# Altium PCB 14.22x14.22.PcbDoc
Units mil, origin at the board's own origin, x right, y up, seen from the top; angles counter-clockwise.
Board outline 14220 x 14220 mil, 4 copper layers (Top Layer, Internal Plane 1, Internal Plane 2, Bottom Layer), stack 18.2 mil thick; 322 components, 110 nets, 810 pads, 0 vias.
Unrouted connection lines stored in the file: 678.
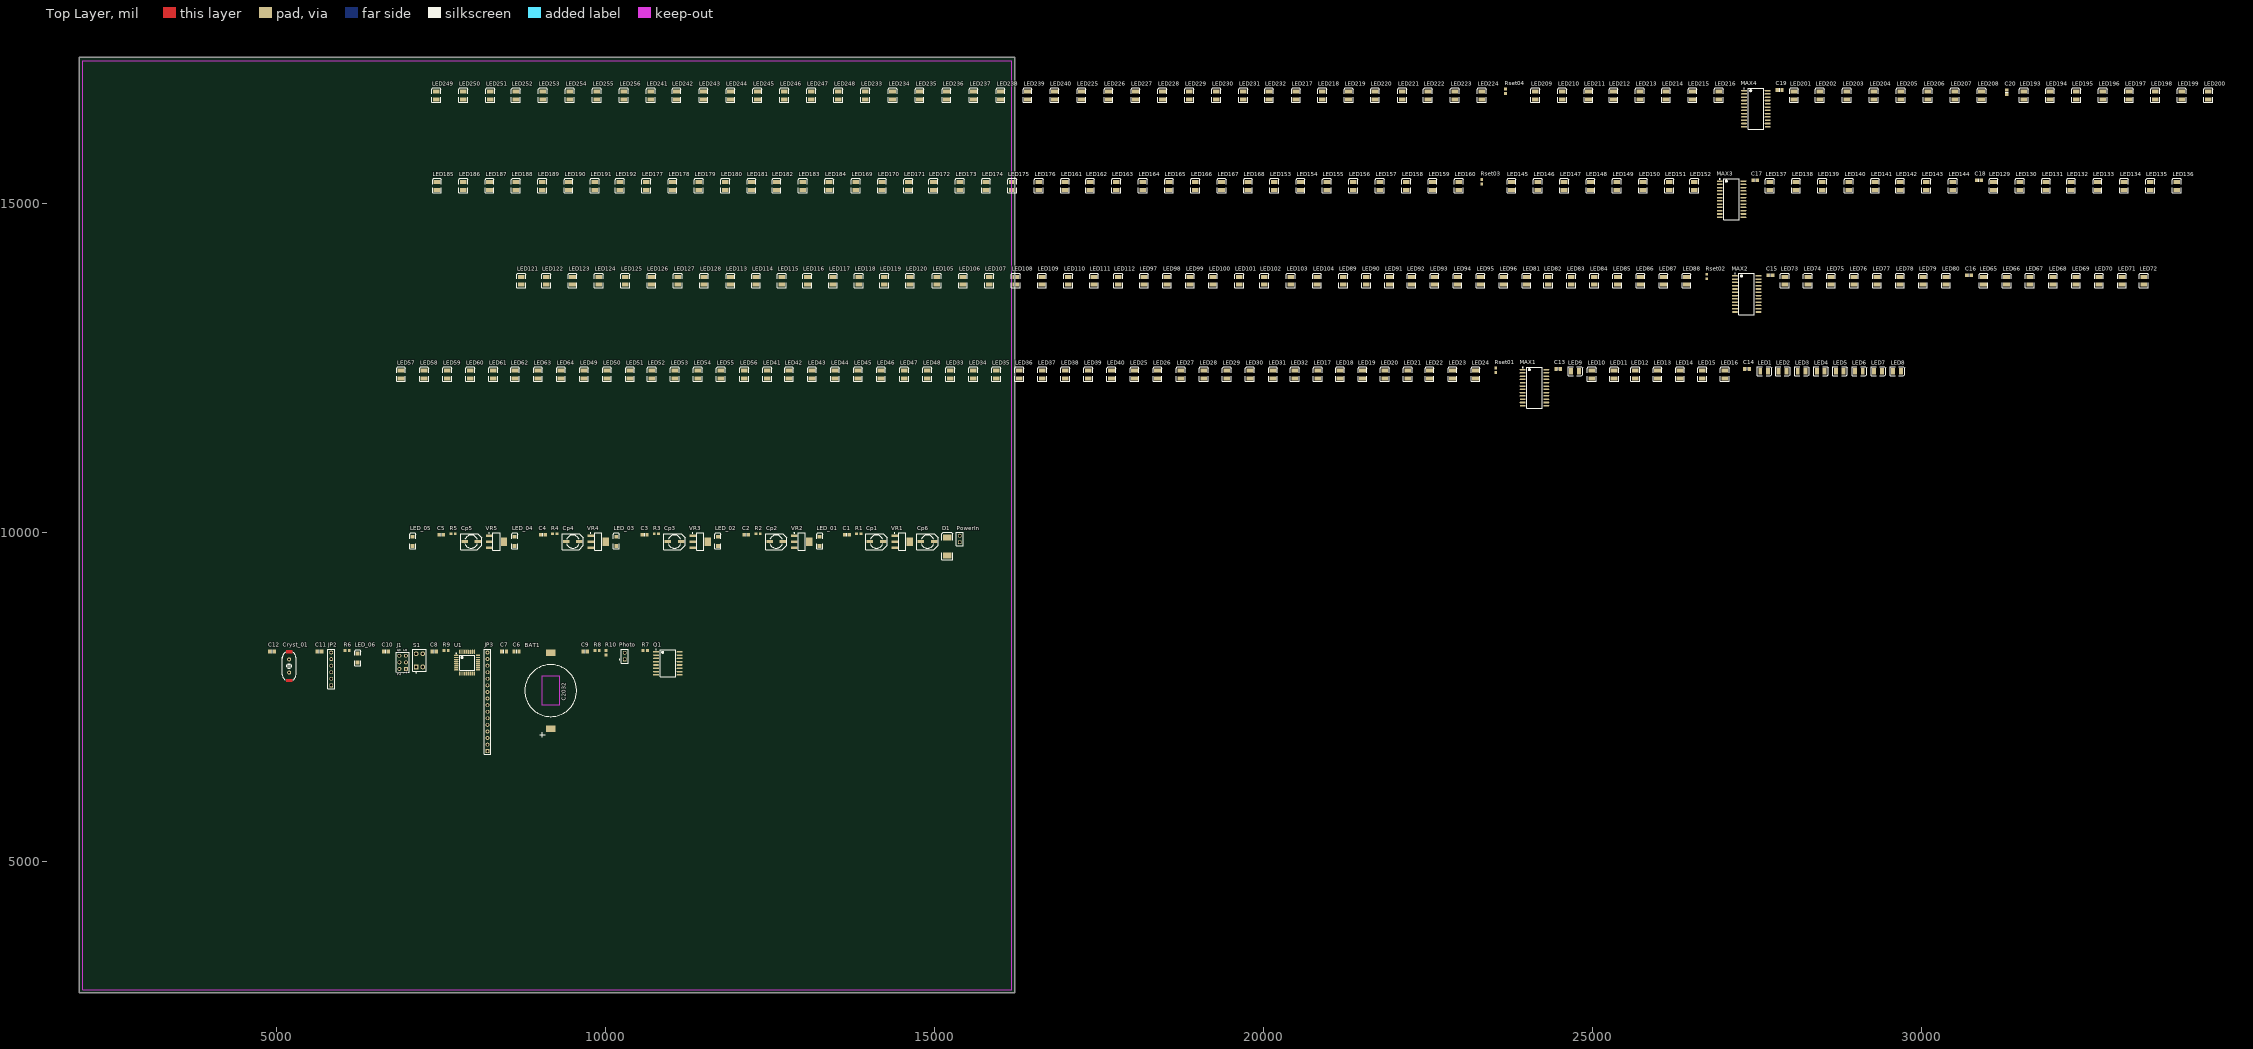
[diagram p0: Top Layer view]
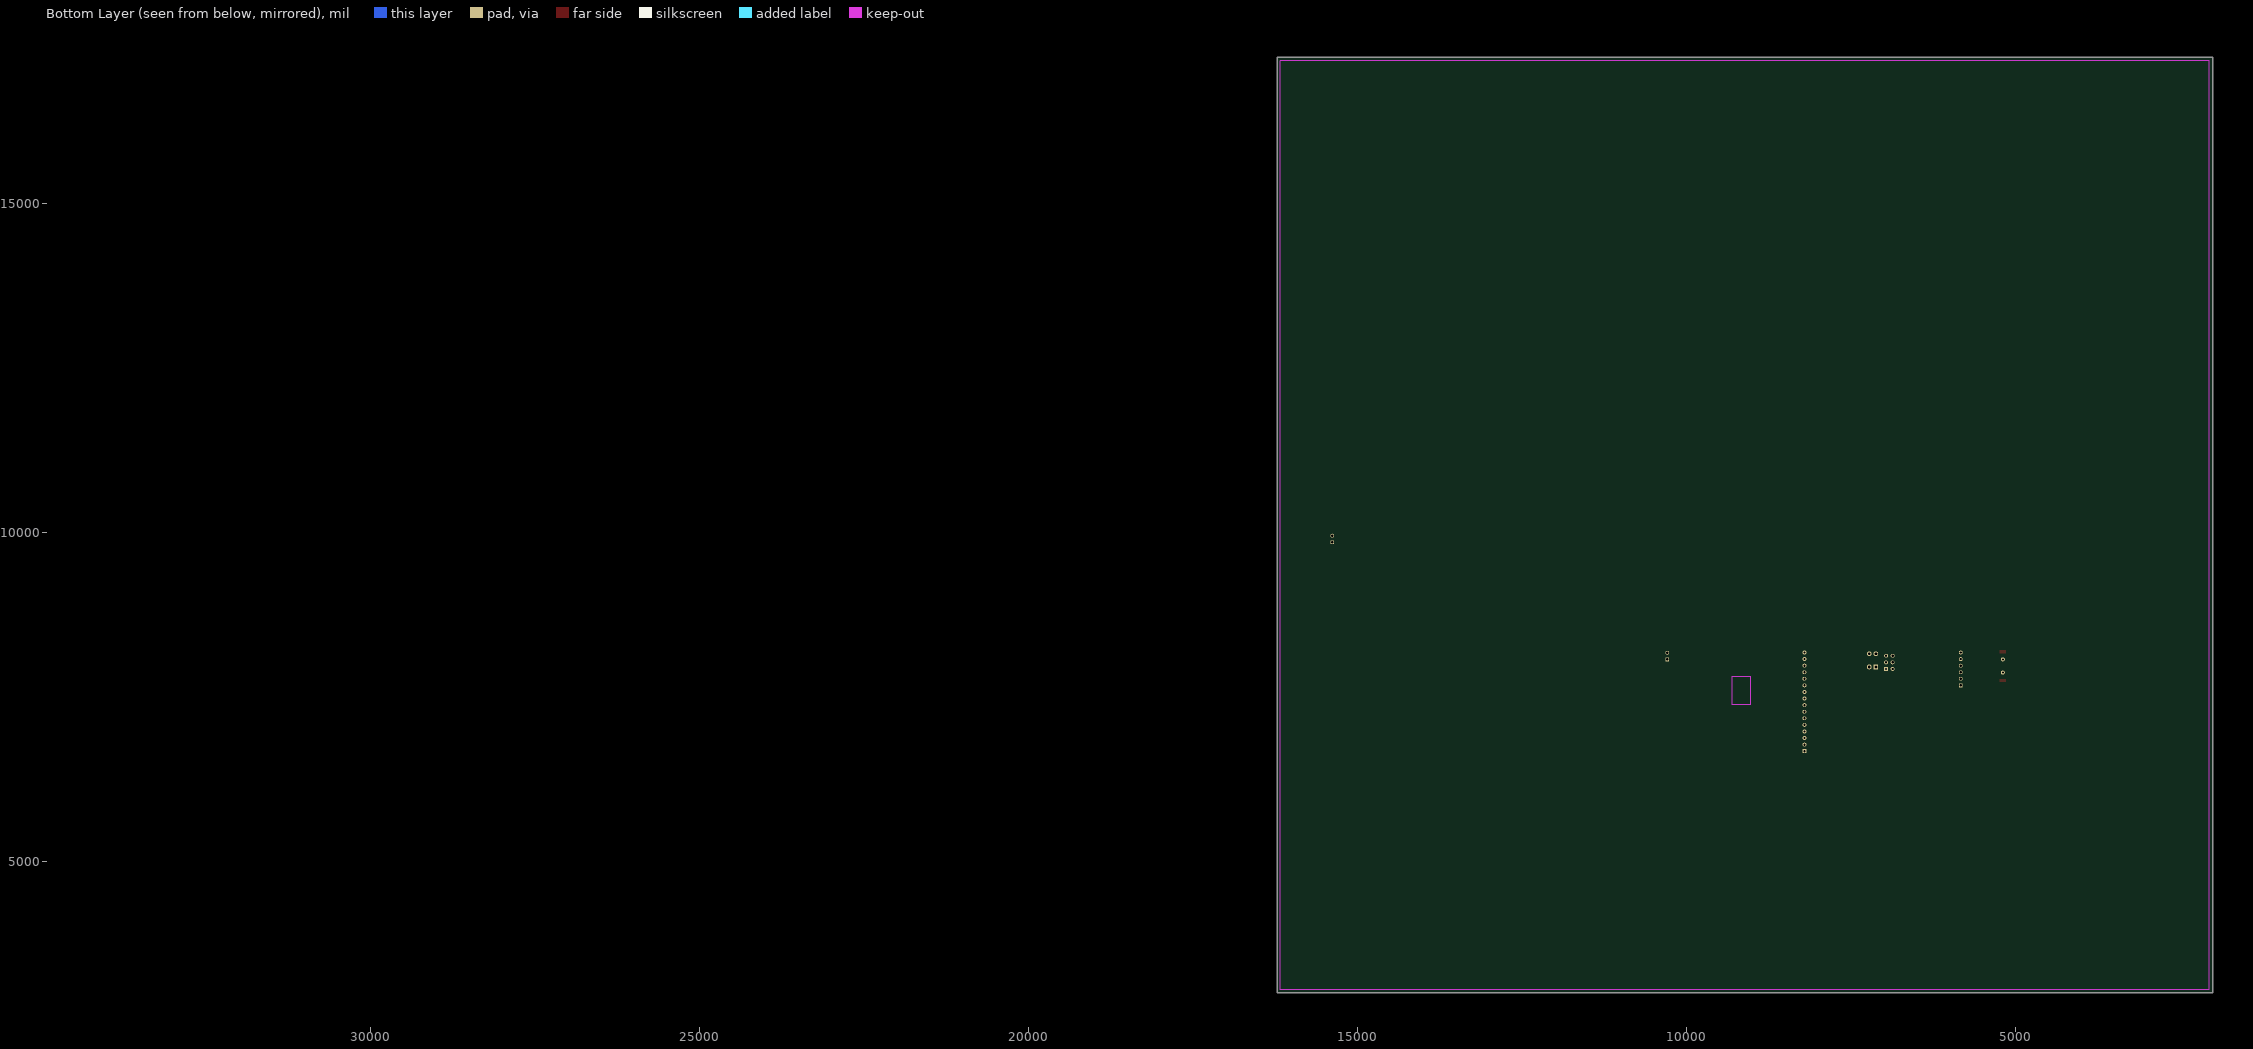
[diagram p1: Bottom Layer view, seen from below]
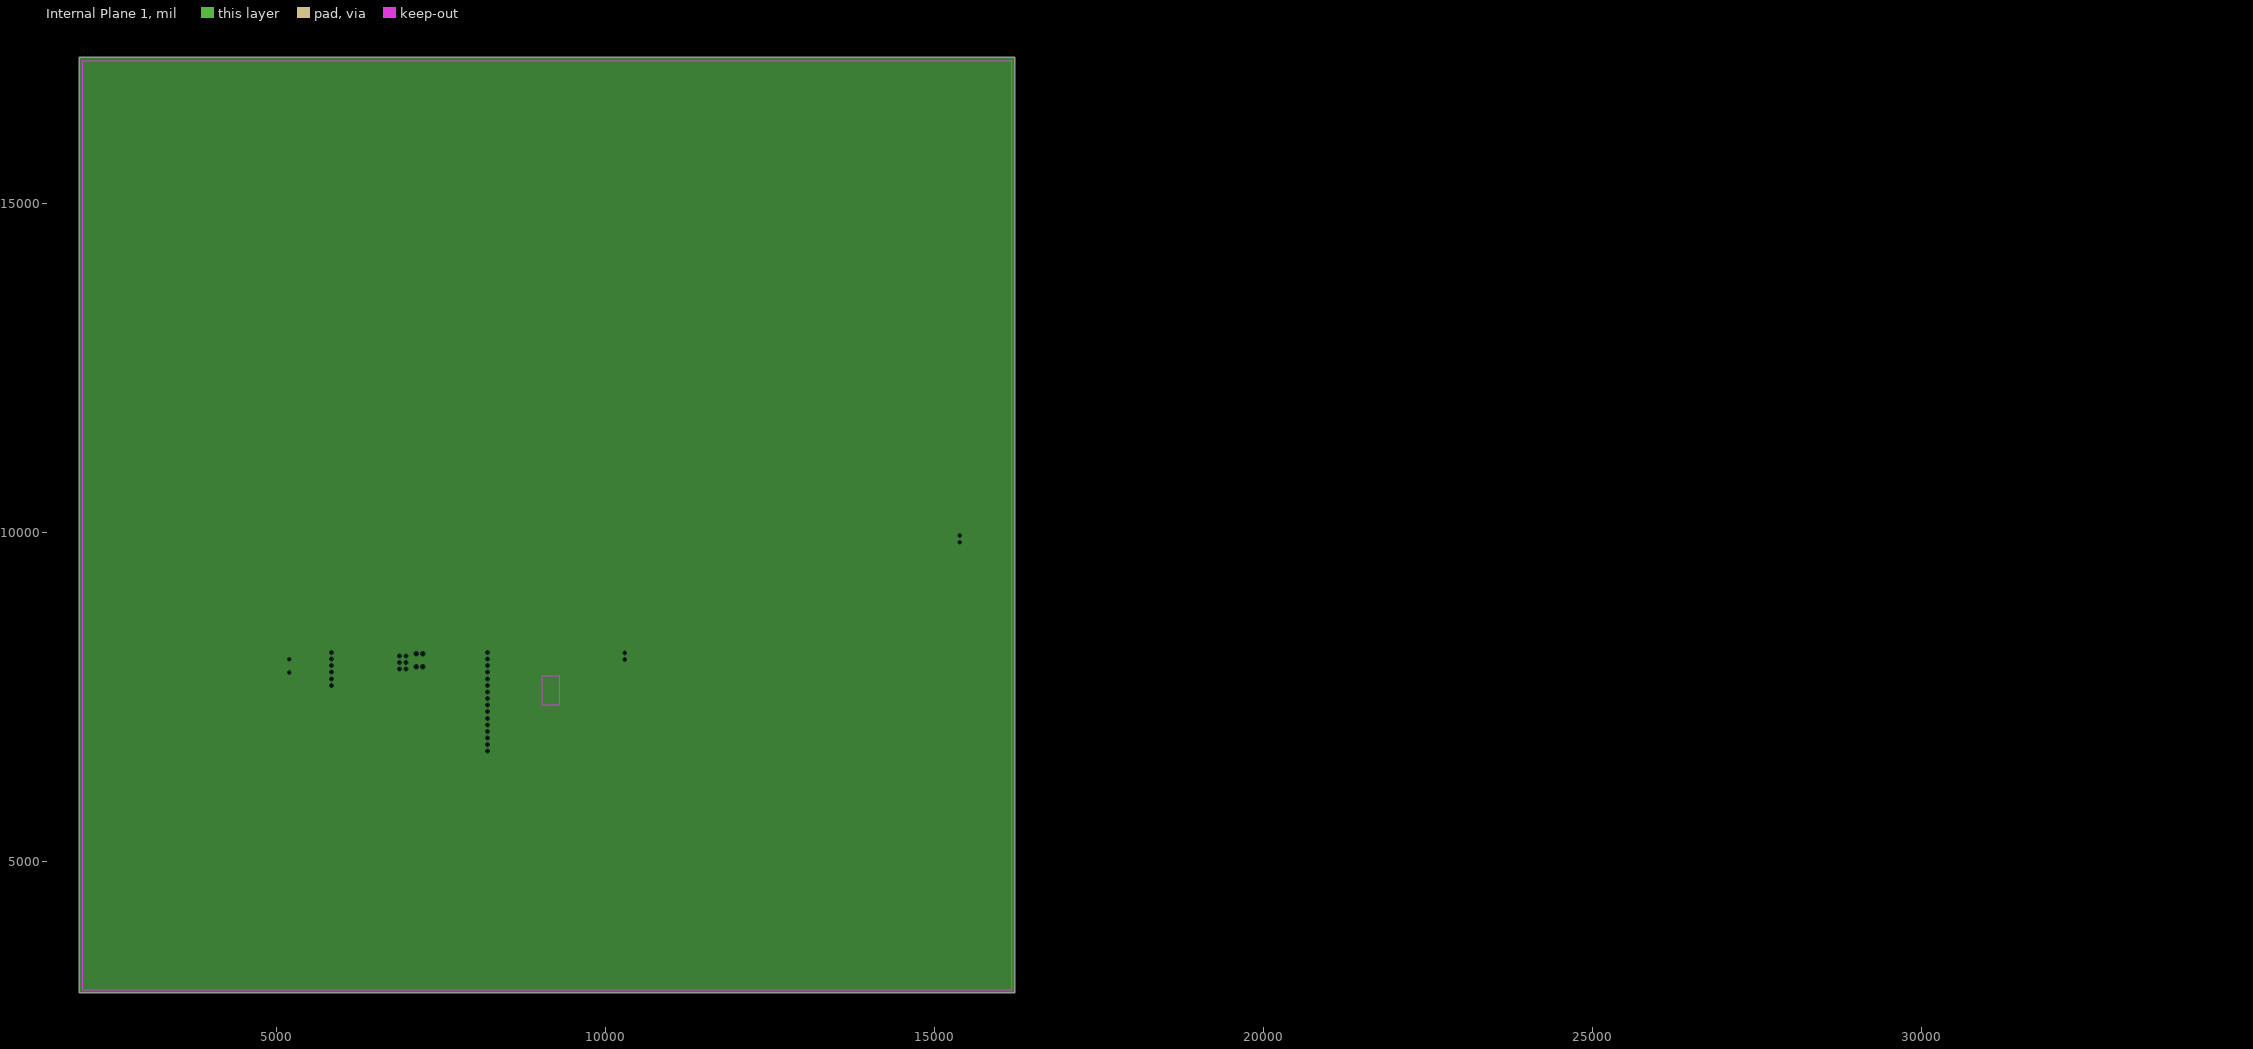
[diagram p2: Internal Plane 1, clearances drawn from the general rule]
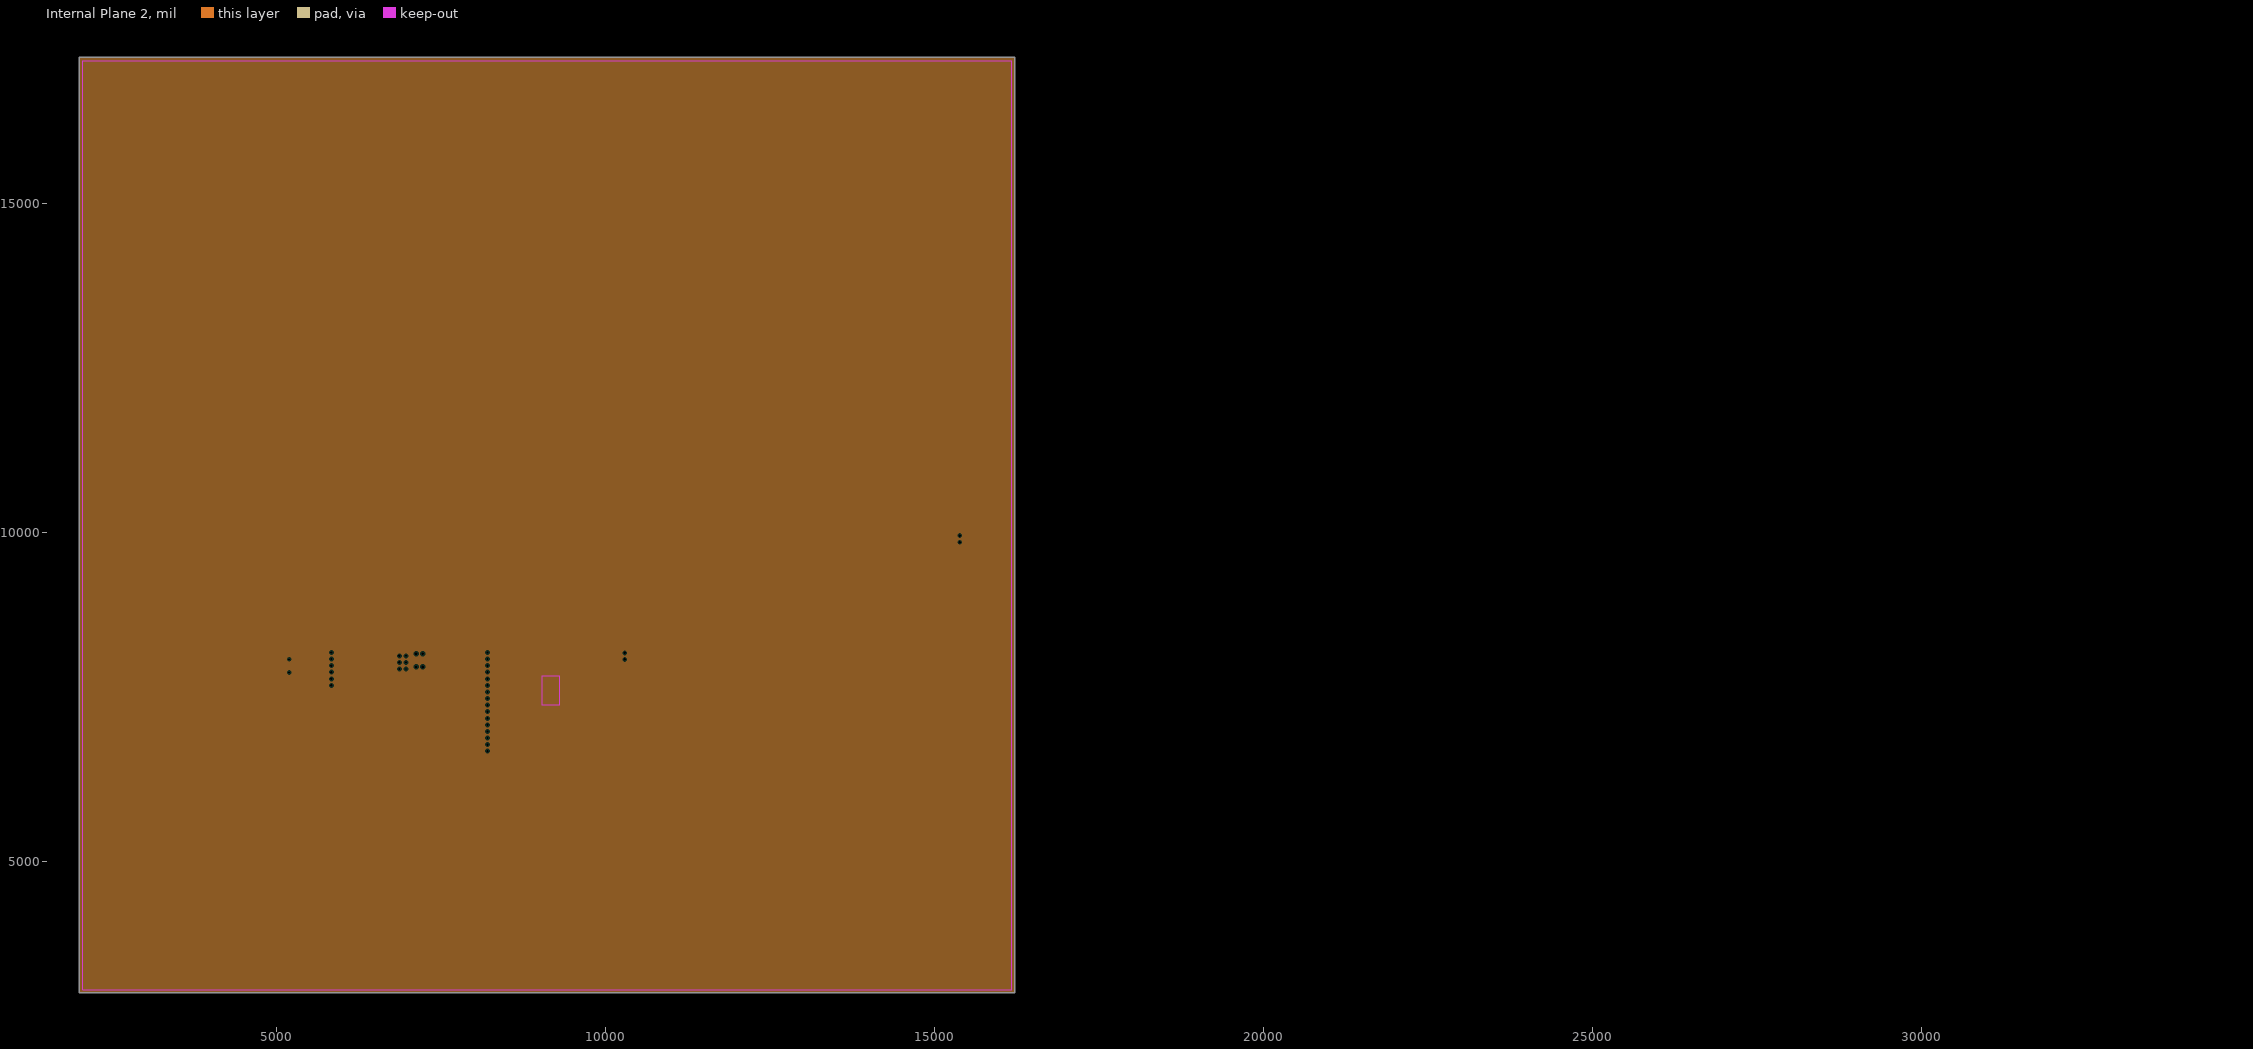
[diagram p3: Internal Plane 2, clearances drawn from the general rule]

## Layer stack, top to bottom
Top Solder: solder mask 0.4, Solder Resist, Dk 3.5
Top Layer: signal copper 1.4
Internal Plane 1: plane copper 1.4
Internal Plane 2: plane copper 1.4
Dielectric 1: dielectric 12.6, FR-4, Dk 4.8
Bottom Layer: signal copper 1.4
Bottom Solder: solder mask 0.4, Solder Resist, Dk 3.5

## Board outline
2000,3000 16220,3000 16220,17220 2000,17220

## Design rules (kind name [scope] priority, off if disabled: settings)
Clearance [All] p1: gap=8
PlaneClearance [All] p1: clearance=20
PlaneConnect [All] p1: planeconnectstyle=Relief reliefexpansion=20 reliefentries=4 reliefconductorwidth=10 reliefairgap=10
PolygonConnect [All] p1: connectstyle=Relief reliefconductorwidth=10 reliefentries=4 polygonreliefangle="90 Angle" airgapwidth=10
RoomDefinition U_Schematics [InComponentClass('U_Schematics')] p1: confinementstyle=ConfineIn formatcopy=TRUE lockcomponents=FALSE outline 4849.13,6615 11189.13,6615 11189.13,8335 4849.13,8335
RoomDefinition U_PowerSystem [InComponentClass('U_PowerSystem')] p2: confinementstyle=ConfineIn formatcopy=TRUE lockcomponents=FALSE outline 7010.43,9575 15745.43,9575 15745.43,10110 7010.43,10110
RoomDefinition U_LED_Driver_and_LEDs_04 [InComponentClass('U_LED_Driver_and_LEDs_04')] p3: confinementstyle=ConfineIn formatcopy=TRUE lockcomponents=FALSE outline 7345,16109.06 34650,16109.06 34650,16869.06 7345,16869.06
RoomDefinition U_LED_Driver_and_LEDs_03 [InComponentClass('U_LED_Driver_and_LEDs_03')] p4: confinementstyle=ConfineIn formatcopy=TRUE lockcomponents=FALSE outline 7355,14734.06 34160,14734.06 34160,15494.06 7355,15494.06
RoomDefinition U_LED_Driver_and_LEDs_02 [InComponentClass('U_LED_Driver_and_LEDs_02')] p5: confinementstyle=ConfineIn formatcopy=TRUE lockcomponents=FALSE outline 8635,13294.06 33610,13294.06 33610,14054.06 8635,14054.06
RoomDefinition U_LED_Driver_and_LEDs_01 [InComponentClass('U_LED_Driver_and_LEDs_01')] p6: confinementstyle=ConfineIn formatcopy=TRUE lockcomponents=FALSE outline 6810,11869.06 29765,11869.06 29765,12629.06 6810,12629.06
RoutingVias [All] p1: holewidth=25 width=40 viastyle="Through Hole" minholewidth=28 minwidth=50 maxholewidth=28 maxwidth=50
SolderMaskExpansion [All] p1: expansion=4
Width [All] p1: maxlimit=8 minlimit=8 preferedwidth=8
28 further rules are at their usual default settings.

## Classes and differential pairs
component class U_Schematics: BAT1 C6 C7 C8 C9 C10 C11 C12 Cryst_01 J1 JP2 JP3 LED_06 Photo Q1 R6 R7 R8 R9 R10 S1 U1
component class U_PowerSystem: C1 C2 C3 C4 C5 Cp1 Cp2 Cp3 Cp4 Cp5 Cp6 D1 LED_01 LED_02 LED_03 LED_04 LED_05 PowerIn R1 R2 R3 R4 R5 VR1 VR2 VR3 VR4 VR5
component class U_LED_Driver_and_LEDs_04: C19 C20 LED193 LED194 LED195 LED196 LED197 LED198 LED199 LED200 LED201 LED202 LED203 LED204 LED205 LED206 LED207 LED208 LED209 LED210 LED211 LED212 LED213 LED214 LED215 LED216 LED217 LED218 LED219 LED220 LED221 LED222 LED223 LED224 LED225 LED226 LED227 LED228 LED229 LED230 LED231 LED232 LED233 LED234 LED235 LED236 LED237 LED238 LED239 LED240 LED241 LED242 LED243 LED244 LED245 LED246 LED247 LED248 LED249 LED250 LED251 LED252 LED253 LED254 LED255 LED256 MAX4 Rset04
component class U_LED_Driver_and_LEDs_03: C17 C18 LED129 LED130 LED131 LED132 LED133 LED134 LED135 LED136 LED137 LED138 LED139 LED140 LED141 LED142 LED143 LED144 LED145 LED146 LED147 LED148 LED149 LED150 LED151 LED152 LED153 LED154 LED155 LED156 LED157 LED158 LED159 LED160 LED161 LED162 LED163 LED164 LED165 LED166 LED167 LED168 LED169 LED170 LED171 LED172 LED173 LED174 LED175 LED176 LED177 LED178 LED179 LED180 LED181 LED182 LED183 LED184 LED185 LED186 LED187 LED188 LED189 LED190 LED191 LED192 MAX3 Rset03
component class U_LED_Driver_and_LEDs_02: C15 C16 LED65 LED66 LED67 LED68 LED69 LED70 LED71 LED72 LED73 LED74 LED75 LED76 LED77 LED78 LED79 LED80 LED81 LED82 LED83 LED84 LED85 LED86 LED87 LED88 LED89 LED90 LED91 LED92 LED93 LED94 LED95 LED96 LED97 LED98 LED99 LED100 LED101 LED102 LED103 LED104 LED105 LED106 LED107 LED108 LED109 LED110 LED111 LED112 LED113 LED114 LED115 LED116 LED117 LED118 LED119 LED120 LED121 LED122 LED123 LED124 LED125 LED126 LED127 LED128 MAX2 Rset02
component class U_LED_Driver_and_LEDs_01: C13 C14 LED1 LED2 LED3 LED4 LED5 LED6 LED7 LED8 LED9 LED10 LED11 LED12 LED13 LED14 LED15 LED16 LED17 LED18 LED19 LED20 LED21 LED22 LED23 LED24 LED25 LED26 LED27 LED28 LED29 LED30 LED31 LED32 LED33 LED34 LED35 LED36 LED37 LED38 LED39 LED40 LED41 LED42 LED43 LED44 LED45 LED46 LED47 LED48 LED49 LED50 LED51 LED52 LED53 LED54 LED55 LED56 LED57 LED58 LED59 LED60 LED61 LED62 LED63 LED64 MAX1 Rset01

## Components (designator, comment, footprint, x,y, rotation, side; value= is the part's Value field where it differs from the comment)
BAT1 "2032 Battery Holder, SMT" "C2032 Battery Holder" 9164.13,7595 r90 top
C1 "Cap Semi" 6-0805_N 13665.43,9965 r0 top
C2 "Cap Semi" 6-0805_N 12135.43,9965 r0 top
C3 "Cap Semi" 6-0805_N 10590.43,9965 r0 top
C4 "Cap Semi" 6-0805_N 9045.43,9965 r0 top
C5 "Cap Semi" 6-0805_N 7500.43,9965 r0 top
C6 "Cap Semi" 6-0805_N 8644.13,8190 r0 top
C7 "Cap Semi" 6-0805_N 8454.13,8190 r0 top
C8 "Cap Semi" 6-0805_N 7394.13,8190 r0 top
C9 "Cap Semi" 6-0805_N 9689.13,8190 r0 top
C10 "Cap Semi" 6-0805_N 6659.13,8190 r0 top
C11 "Cap Semi" 6-0805_N 5649.13,8190 r0 top
C12 "Cap Semi" 6-0805_N 4929.13,8190 r0 top
C13 "Cap Semi" 6-0805_N 24475,12484.06 r0 top
C14 "Cap Semi" 6-0805_N 27345,12484.06 r0 top
C15 "Cap Semi" 6-0805_N 27700,13909.06 r0 top
C16 "Cap Semi" 6-0805_N 30720,13909.06 r0 top
C17 "Cap Semi" 6-0805_N 27470,15349.06 r0 top
C18 "Cap Semi" 6-0805_N 30870,15349.06 r0 top
C19 "Cap Semi" 6-0805_N 27840,16724.06 r0 top
C20 "Cap Semi" 6-0805_N 31290,16689.06 r90 top
Cp1 "Cap Pol3" 1CA470WR 14115.43,9860 r0 top
Cp2 "Cap Pol3" 1CA470WR 12590.43,9860 r0 top
Cp3 "Cap Pol3" 1CA470WR 11045.43,9860 r0 top
Cp4 "Cap Pol3" 1CA470WR 9500.43,9860 r0 top
Cp5 "Cap Pol3" 1CA470WR 7955.43,9860 r0 top
Cp6 "Cap Pol3" 1CA470WR 14890.43,9860 r0 top
Cryst_01 "Crystal Oscillator" "Crystal Oscillator" 5189.13,7970 r90 top
D1 "Diode" SMC 15190.43,9785 r90 top
J1 "ICSP" HDR2X3 6964.13,7925 r90 top
JP2 "UART" HDR1X6 5829.13,7675 r90 top
JP3 "Header 16" HDR1X16 8204.13,6675 r90 top
LED1 "LED3" 3.5X2.8X1.9 27605,12449.06 r0 top
LED2 "LED3" 3.5X2.8X1.9 27885,12449.06 r0 top
LED3 "LED3" 3.5X2.8X1.9 28175,12449.06 r0 top
LED4 "LED3" 3.5X2.8X1.9 28465,12449.06 r0 top
LED5 "LED3" 3.5X2.8X1.9 28755,12449.06 r0 top
LED6 "LED3" 3.5X2.8X1.9 29045,12449.06 r0 top
LED7 "LED3" 3.5X2.8X1.9 29335,12449.06 r0 top
LED8 "LED3" 3.5X2.8X1.9 29625,12449.06 r0 top
LED9 "LED3" 3.5X2.8X1.9 24730,12449.06 r0 top
LED10 "LED3" 3.5X2.8X1.9 24985,12399.06 r90 top
LED11 "LED3" 3.5X2.8X1.9 25325,12399.06 r90 top
LED12 "LED3" 3.5X2.8X1.9 25645,12399.06 r90 top
LED13 "LED3" 3.5X2.8X1.9 25985,12399.06 r90 top
LED14 "LED3" 3.5X2.8X1.9 26325,12399.06 r90 top
LED15 "LED3" 3.5X2.8X1.9 26665,12399.06 r90 top
LED16 "LED3" 3.5X2.8X1.9 27005,12399.06 r90 top
LED17 "LED3" 3.5X2.8X1.9 20820,12399.06 r90 top
LED18 "LED3" 3.5X2.8X1.9 21160,12399.06 r90 top
LED19 "LED3" 3.5X2.8X1.9 21500,12399.06 r90 top
LED20 "LED3" 3.5X2.8X1.9 21840,12399.06 r90 top
LED21 "LED3" 3.5X2.8X1.9 22190,12399.06 r90 top
LED22 "LED3" 3.5X2.8X1.9 22520,12399.06 r90 top
LED23 "LED3" 3.5X2.8X1.9 22870,12399.06 r90 top
LED24 "LED3" 3.5X2.8X1.9 23220,12399.06 r90 top
LED25 "LED3" 3.5X2.8X1.9 18035,12399.06 r90 top
LED26 "LED3" 3.5X2.8X1.9 18385,12399.06 r90 top
LED27 "LED3" 3.5X2.8X1.9 18740,12399.06 r90 top
LED28 "LED3" 3.5X2.8X1.9 19090,12399.06 r90 top
LED29 "LED3" 3.5X2.8X1.9 19440,12399.06 r90 top
LED30 "LED3" 3.5X2.8X1.9 19790,12399.06 r90 top
LED31 "LED3" 3.5X2.8X1.9 20140,12399.06 r90 top
LED32 "LED3" 3.5X2.8X1.9 20470,12399.06 r90 top
LED33 "LED3" 3.5X2.8X1.9 15235,12399.06 r90 top
LED34 "LED3" 3.5X2.8X1.9 15585,12399.06 r90 top
LED35 "LED3" 3.5X2.8X1.9 15935,12399.06 r90 top
LED36 "LED3" 3.5X2.8X1.9 16285,12399.06 r90 top
LED37 "LED3" 3.5X2.8X1.9 16635,12399.06 r90 top
LED38 "LED3" 3.5X2.8X1.9 16985,12399.06 r90 top
LED39 "LED3" 3.5X2.8X1.9 17335,12399.06 r90 top
LED40 "LED3" 3.5X2.8X1.9 17685,12399.06 r90 top
LED41 "LED3" 3.5X2.8X1.9 12455,12399.06 r90 top
LED42 "LED3" 3.5X2.8X1.9 12785,12399.06 r90 top
LED43 "LED3" 3.5X2.8X1.9 13135,12399.06 r90 top
LED44 "LED3" 3.5X2.8X1.9 13485,12399.06 r90 top
LED45 "LED3" 3.5X2.8X1.9 13835,12399.06 r90 top
LED46 "LED3" 3.5X2.8X1.9 14185,12399.06 r90 top
LED47 "LED3" 3.5X2.8X1.9 14535,12399.06 r90 top
LED48 "LED3" 3.5X2.8X1.9 14885,12399.06 r90 top
LED49 "LED3" 3.5X2.8X1.9 9670,12399.06 r90 top
LED50 "LED3" 3.5X2.8X1.9 10020,12399.06 r90 top
LED51 "LED3" 3.5X2.8X1.9 10370,12399.06 r90 top
LED52 "LED3" 3.5X2.8X1.9 10700,12399.06 r90 top
LED53 "LED3" 3.5X2.8X1.9 11050,12399.06 r90 top
LED54 "LED3" 3.5X2.8X1.9 11400,12399.06 r90 top
LED55 "LED3" 3.5X2.8X1.9 11750,12399.06 r90 top
LED56 "LED3" 3.5X2.8X1.9 12105,12399.06 r90 top
LED57 "LED3" 3.5X2.8X1.9 6890,12399.06 r90 top
LED58 "LED3" 3.5X2.8X1.9 7240,12399.06 r90 top
LED59 "LED3" 3.5X2.8X1.9 7590,12399.06 r90 top
LED60 "LED3" 3.5X2.8X1.9 7940,12399.06 r90 top
LED61 "LED3" 3.5X2.8X1.9 8290,12399.06 r90 top
LED62 "LED3" 3.5X2.8X1.9 8620,12399.06 r90 top
LED63 "LED3" 3.5X2.8X1.9 8970,12399.06 r90 top
LED64 "LED3" 3.5X2.8X1.9 9320,12399.06 r90 top
LED65 "LED3" 3.5X2.8X1.9 30940,13824.06 r90 top
LED66 "LED3" 3.5X2.8X1.9 31290,13824.06 r90 top
LED67 "LED3" 3.5X2.8X1.9 31640,13824.06 r90 top
LED68 "LED3" 3.5X2.8X1.9 31995,13824.06 r90 top
LED69 "LED3" 3.5X2.8X1.9 32345,13824.06 r90 top
LED70 "LED3" 3.5X2.8X1.9 32695,13824.06 r90 top
LED71 "LED3" 3.5X2.8X1.9 33045,13824.06 r90 top
LED72 "LED3" 3.5X2.8X1.9 33375,13824.06 r90 top
LED73 "LED3" 3.5X2.8X1.9 27920,13824.06 r90 top
LED74 "LED3" 3.5X2.8X1.9 28270,13824.06 r90 top
LED75 "LED3" 3.5X2.8X1.9 28620,13824.06 r90 top
LED76 "LED3" 3.5X2.8X1.9 28970,13824.06 r90 top
LED77 "LED3" 3.5X2.8X1.9 29320,13824.06 r90 top
LED78 "LED3" 3.5X2.8X1.9 29670,13824.06 r90 top
LED79 "LED3" 3.5X2.8X1.9 30020,13824.06 r90 top
LED80 "LED3" 3.5X2.8X1.9 30370,13824.06 r90 top
LED81 "LED3" 3.5X2.8X1.9 23995,13824.06 r90 top
LED82 "LED3" 3.5X2.8X1.9 24325,13824.06 r90 top
LED83 "LED3" 3.5X2.8X1.9 24675,13824.06 r90 top
LED84 "LED3" 3.5X2.8X1.9 25025,13824.06 r90 top
LED85 "LED3" 3.5X2.8X1.9 25375,13824.06 r90 top
LED86 "LED3" 3.5X2.8X1.9 25725,13824.06 r90 top
LED87 "LED3" 3.5X2.8X1.9 26075,13824.06 r90 top
LED88 "LED3" 3.5X2.8X1.9 26425,13824.06 r90 top
LED89 "LED3" 3.5X2.8X1.9 21210,13824.06 r90 top
LED90 "LED3" 3.5X2.8X1.9 21560,13824.06 r90 top
LED91 "LED3" 3.5X2.8X1.9 21910,13824.06 r90 top
LED92 "LED3" 3.5X2.8X1.9 22245,13824.06 r90 top
LED93 "LED3" 3.5X2.8X1.9 22595,13824.06 r90 top
LED94 "LED3" 3.5X2.8X1.9 22945,13824.06 r90 top
LED95 "LED3" 3.5X2.8X1.9 23295,13824.06 r90 top
LED96 "LED3" 3.5X2.8X1.9 23645,13824.06 r90 top
LED97 "LED3" 3.5X2.8X1.9 18180,13824.06 r90 top
LED98 "LED3" 3.5X2.8X1.9 18530,13824.06 r90 top
LED99 "LED3" 3.5X2.8X1.9 18880,13824.06 r90 top
LED100 "LED3" 3.5X2.8X1.9 19230,13824.06 r90 top
LED101 "LED3" 3.5X2.8X1.9 19630,13824.06 r90 top
LED102 "LED3" 3.5X2.8X1.9 20010,13824.06 r90 top
LED103 "LED3" 3.5X2.8X1.9 20410,13824.06 r90 top
LED104 "LED3" 3.5X2.8X1.9 20810,13824.06 r90 top
LED105 "LED3" 3.5X2.8X1.9 15030,13824.06 r90 top
LED106 "LED3" 3.5X2.8X1.9 15430,13824.06 r90 top
LED107 "LED3" 3.5X2.8X1.9 15830,13824.06 r90 top
LED108 "LED3" 3.5X2.8X1.9 16230,13824.06 r90 top
LED109 "LED3" 3.5X2.8X1.9 16630,13824.06 r90 top
LED110 "LED3" 3.5X2.8X1.9 17030,13824.06 r90 top
LED111 "LED3" 3.5X2.8X1.9 17420,13824.06 r90 top
LED112 "LED3" 3.5X2.8X1.9 17790,13824.06 r90 top
LED113 "LED3" 3.5X2.8X1.9 11895,13824.06 r90 top
LED114 "LED3" 3.5X2.8X1.9 12285,13824.06 r90 top
LED115 "LED3" 3.5X2.8X1.9 12675,13824.06 r90 top
LED116 "LED3" 3.5X2.8X1.9 13065,13824.06 r90 top
LED117 "LED3" 3.5X2.8X1.9 13455,13824.06 r90 top
LED118 "LED3" 3.5X2.8X1.9 13845,13824.06 r90 top
LED119 "LED3" 3.5X2.8X1.9 14235,13824.06 r90 top
LED120 "LED3" 3.5X2.8X1.9 14625,13824.06 r90 top
LED121 "LED3" 3.5X2.8X1.9 8715,13824.06 r90 top
LED122 "LED3" 3.5X2.8X1.9 9095,13824.06 r90 top
LED123 "LED3" 3.5X2.8X1.9 9495,13824.06 r90 top
LED124 "LED3" 3.5X2.8X1.9 9895,13824.06 r90 top
LED125 "LED3" 3.5X2.8X1.9 10295,13824.06 r90 top
LED126 "LED3" 3.5X2.8X1.9 10695,13824.06 r90 top
LED127 "LED3" 3.5X2.8X1.9 11095,13824.06 r90 top
LED128 "LED3" 3.5X2.8X1.9 11495,13824.06 r90 top
LED129 "LED3" 3.5X2.8X1.9 31090,15264.06 r90 top
LED130 "LED3" 3.5X2.8X1.9 31490,15264.06 r90 top
LED131 "LED3" 3.5X2.8X1.9 31890,15264.06 r90 top
LED132 "LED3" 3.5X2.8X1.9 32270,15264.06 r90 top
LED133 "LED3" 3.5X2.8X1.9 32670,15264.06 r90 top
LED134 "LED3" 3.5X2.8X1.9 33075,15264.06 r90 top
LED135 "LED3" 3.5X2.8X1.9 33475,15264.06 r90 top
LED136 "LED3" 3.5X2.8X1.9 33875,15264.06 r90 top
LED137 "LED3" 3.5X2.8X1.9 27690,15264.06 r90 top
LED138 "LED3" 3.5X2.8X1.9 28090,15264.06 r90 top
LED139 "LED3" 3.5X2.8X1.9 28490,15264.06 r90 top
LED140 "LED3" 3.5X2.8X1.9 28890,15264.06 r90 top
LED141 "LED3" 3.5X2.8X1.9 29290,15264.06 r90 top
LED142 "LED3" 3.5X2.8X1.9 29670,15264.06 r90 top
LED143 "LED3" 3.5X2.8X1.9 30070,15264.06 r90 top
LED144 "LED3" 3.5X2.8X1.9 30470,15264.06 r90 top
LED145 "LED3" 3.5X2.8X1.9 23765,15264.06 r90 top
LED146 "LED3" 3.5X2.8X1.9 24165,15264.06 r90 top
LED147 "LED3" 3.5X2.8X1.9 24565,15264.06 r90 top
LED148 "LED3" 3.5X2.8X1.9 24965,15264.06 r90 top
LED149 "LED3" 3.5X2.8X1.9 25365,15264.06 r90 top
LED150 "LED3" 3.5X2.8X1.9 25765,15264.06 r90 top
LED151 "LED3" 3.5X2.8X1.9 26165,15264.06 r90 top
LED152 "LED3" 3.5X2.8X1.9 26545,15264.06 r90 top
LED153 "LED3" 3.5X2.8X1.9 20160,15264.06 r90 top
LED154 "LED3" 3.5X2.8X1.9 20560,15264.06 r90 top
LED155 "LED3" 3.5X2.8X1.9 20960,15264.06 r90 top
LED156 "LED3" 3.5X2.8X1.9 21360,15264.06 r90 top
LED157 "LED3" 3.5X2.8X1.9 21765,15264.06 r90 top
LED158 "LED3" 3.5X2.8X1.9 22165,15264.06 r90 top
LED159 "LED3" 3.5X2.8X1.9 22565,15264.06 r90 top
LED160 "LED3" 3.5X2.8X1.9 22965,15264.06 r90 top
LED161 "LED3" 3.5X2.8X1.9 16980,15264.06 r90 top
LED162 "LED3" 3.5X2.8X1.9 17360,15264.06 r90 top
LED163 "LED3" 3.5X2.8X1.9 17760,15264.06 r90 top
LED164 "LED3" 3.5X2.8X1.9 18160,15264.06 r90 top
LED165 "LED3" 3.5X2.8X1.9 18560,15264.06 r90 top
LED166 "LED3" 3.5X2.8X1.9 18960,15264.06 r90 top
LED167 "LED3" 3.5X2.8X1.9 19360,15264.06 r90 top
LED168 "LED3" 3.5X2.8X1.9 19760,15264.06 r90 top
LED169 "LED3" 3.5X2.8X1.9 13800,15264.06 r90 top
LED170 "LED3" 3.5X2.8X1.9 14200,15264.06 r90 top
LED171 "LED3" 3.5X2.8X1.9 14600,15264.06 r90 top
LED172 "LED3" 3.5X2.8X1.9 14980,15264.06 r90 top
LED173 "LED3" 3.5X2.8X1.9 15380,15264.06 r90 top
LED174 "LED3" 3.5X2.8X1.9 15780,15264.06 r90 top
LED175 "LED3" 3.5X2.8X1.9 16180,15264.06 r90 top
LED176 "LED3" 3.5X2.8X1.9 16580,15264.06 r90 top
LED177 "LED3" 3.5X2.8X1.9 10615,15264.06 r90 top
LED178 "LED3" 3.5X2.8X1.9 11015,15264.06 r90 top
LED179 "LED3" 3.5X2.8X1.9 11415,15264.06 r90 top
LED180 "LED3" 3.5X2.8X1.9 11815,15264.06 r90 top
LED181 "LED3" 3.5X2.8X1.9 12215,15264.06 r90 top
LED182 "LED3" 3.5X2.8X1.9 12595,15264.06 r90 top
LED183 "LED3" 3.5X2.8X1.9 12995,15264.06 r90 top
LED184 "LED3" 3.5X2.8X1.9 13395,15264.06 r90 top
LED185 "LED3" 3.5X2.8X1.9 7435,15264.06 r90 top
LED186 "LED3" 3.5X2.8X1.9 7835,15264.06 r90 top
LED187 "LED3" 3.5X2.8X1.9 8235,15264.06 r90 top
LED188 "LED3" 3.5X2.8X1.9 8635,15264.06 r90 top
LED189 "LED3" 3.5X2.8X1.9 9035,15264.06 r90 top
LED190 "LED3" 3.5X2.8X1.9 9435,15264.06 r90 top
LED191 "LED3" 3.5X2.8X1.9 9835,15264.06 r90 top
LED192 "LED3" 3.5X2.8X1.9 10215,15264.06 r90 top
LED193 "LED3" 3.5X2.8X1.9 31550,16639.06 r90 top
LED194 "LED3" 3.5X2.8X1.9 31950,16639.06 r90 top
LED195 "LED3" 3.5X2.8X1.9 32350,16639.06 r90 top
LED196 "LED3" 3.5X2.8X1.9 32750,16639.06 r90 top
LED197 "LED3" 3.5X2.8X1.9 33150,16639.06 r90 top
LED198 "LED3" 3.5X2.8X1.9 33550,16639.06 r90 top
LED199 "LED3" 3.5X2.8X1.9 33950,16639.06 r90 top
LED200 "LED3" 3.5X2.8X1.9 34355,16639.06 r90 top
LED201 "LED3" 3.5X2.8X1.9 28060,16639.06 r90 top
LED202 "LED3" 3.5X2.8X1.9 28450,16639.06 r90 top
LED203 "LED3" 3.5X2.8X1.9 28860,16639.06 r90 top
LED204 "LED3" 3.5X2.8X1.9 29270,16639.06 r90 top
LED205 "LED3" 3.5X2.8X1.9 29680,16639.06 r90 top
LED206 "LED3" 3.5X2.8X1.9 30090,16639.06 r90 top
LED207 "LED3" 3.5X2.8X1.9 30500,16639.06 r90 top
LED208 "LED3" 3.5X2.8X1.9 30910,16639.06 r90 top
LED209 "LED3" 3.5X2.8X1.9 24125,16639.06 r90 top
LED210 "LED3" 3.5X2.8X1.9 24535,16639.06 r90 top
LED211 "LED3" 3.5X2.8X1.9 24935,16639.06 r90 top
LED212 "LED3" 3.5X2.8X1.9 25315,16639.06 r90 top
LED213 "LED3" 3.5X2.8X1.9 25715,16639.06 r90 top
LED214 "LED3" 3.5X2.8X1.9 26115,16639.06 r90 top
LED215 "LED3" 3.5X2.8X1.9 26515,16639.06 r90 top
LED216 "LED3" 3.5X2.8X1.9 26915,16639.06 r90 top
LED217 "LED3" 3.5X2.8X1.9 20490,16639.06 r90 top
LED218 "LED3" 3.5X2.8X1.9 20890,16639.06 r90 top
LED219 "LED3" 3.5X2.8X1.9 21290,16639.06 r90 top
LED220 "LED3" 3.5X2.8X1.9 21690,16639.06 r90 top
LED221 "LED3" 3.5X2.8X1.9 22105,16639.06 r90 top
LED222 "LED3" 3.5X2.8X1.9 22495,16639.06 r90 top
LED223 "LED3" 3.5X2.8X1.9 22905,16639.06 r90 top
LED224 "LED3" 3.5X2.8X1.9 23315,16639.06 r90 top
LED225 "LED3" 3.5X2.8X1.9 17230,16639.06 r90 top
LED226 "LED3" 3.5X2.8X1.9 17640,16639.06 r90 top
LED227 "LED3" 3.5X2.8X1.9 18050,16639.06 r90 top
LED228 "LED3" 3.5X2.8X1.9 18460,16639.06 r90 top
LED229 "LED3" 3.5X2.8X1.9 18870,16639.06 r90 top
LED230 "LED3" 3.5X2.8X1.9 19280,16639.06 r90 top
LED231 "LED3" 3.5X2.8X1.9 19690,16639.06 r90 top
LED232 "LED3" 3.5X2.8X1.9 20080,16639.06 r90 top
LED233 "LED3" 3.5X2.8X1.9 13945,16639.06 r90 top
LED234 "LED3" 3.5X2.8X1.9 14360,16639.06 r90 top
LED235 "LED3" 3.5X2.8X1.9 14770,16639.06 r90 top
LED236 "LED3" 3.5X2.8X1.9 15180,16639.06 r90 top
LED237 "LED3" 3.5X2.8X1.9 15590,16639.06 r90 top
LED238 "LED3" 3.5X2.8X1.9 16000,16639.06 r90 top
LED239 "LED3" 3.5X2.8X1.9 16410,16639.06 r90 top
LED240 "LED3" 3.5X2.8X1.9 16820,16639.06 r90 top
LED241 "LED3" 3.5X2.8X1.9 10685,16639.06 r90 top
LED242 "LED3" 3.5X2.8X1.9 11075,16639.06 r90 top
LED243 "LED3" 3.5X2.8X1.9 11485,16639.06 r90 top
LED244 "LED3" 3.5X2.8X1.9 11895,16639.06 r90 top
LED245 "LED3" 3.5X2.8X1.9 12305,16639.06 r90 top
LED246 "LED3" 3.5X2.8X1.9 12715,16639.06 r90 top
LED247 "LED3" 3.5X2.8X1.9 13125,16639.06 r90 top
LED248 "LED3" 3.5X2.8X1.9 13535,16639.06 r90 top
LED249 "LED3" 3.5X2.8X1.9 7425,16639.06 r90 top
LED250 "LED3" 3.5X2.8X1.9 7835,16639.06 r90 top
LED251 "LED3" 3.5X2.8X1.9 8245,16639.06 r90 top
LED252 "LED3" 3.5X2.8X1.9 8635,16639.06 r90 top
LED253 "LED3" 3.5X2.8X1.9 9045,16639.06 r90 top
LED254 "LED3" 3.5X2.8X1.9 9455,16639.06 r90 top
LED255 "LED3" 3.5X2.8X1.9 9865,16639.06 r90 top
LED256 "LED3" 3.5X2.8X1.9 10275,16639.06 r90 top
LED_01 "LED2" 3.2X1.6X1.1 13250.43,9865 r90 top
LED_02 "LED2" 3.2X1.6X1.1 11705.43,9865 r90 top
LED_03 "LED2" 3.2X1.6X1.1 10160.43,9865 r90 top
LED_04 "LED2" 3.2X1.6X1.1 8615.43,9865 r90 top
LED_05 "LED2" 3.2X1.6X1.1 7065.43,9865 r90 top
LED_06 "LED2" 3.2X1.6X1.1 6229.13,8090 r90 top
MAX1 "MAX7219EWG" WSO24_N 24115,12199.06 r0 top
MAX2 "MAX7219EWG" WSO24_N 27340,13624.06 r0 top
MAX3 "MAX7219EWG" WSO24_N 27110,15064.06 r0 top
MAX4 "MAX7219EWG" WSO24_N 27480,16439.06 r0 top
Photo "Photo Sen" PIN2 10289.13,8070 r90 top
PowerIn "Header 2" HDR1X2 15380.43,9850 r90 top
Q1 "DS3231SN" W16-H2_N 10944.13,8010 r0 top
R1 "Res2" J1-0603 13845.43,9980 r0 top
R2 "Res2" J1-0603 12315.43,9980 r0 top
R3 "Res2" J1-0603 10770.43,9980 r0 top
R4 "Res2" J1-0603 9225.43,9980 r0 top
R5 "Res2" J1-0603 7680.43,9980 r0 top
R6 "Res2" J1-0603 6069.13,8205 r0 top
R7 "Res2" J1-0603 10599.13,8205 r0 top
R8 "Res2" J1-0603 9869.13,8205 r0 top
R9 "Res2" J1-0603 7574.13,8205 r0 top
R10 "Res2" J1-0603 10004.13,8170 r90 top
Rset01 "Res2" J1-0603 23525,12464.06 r90 top
Rset02 "Res2" J1-0603 26730,13889.06 r90 top
Rset03 "Res2" J1-0603 23315,15329.06 r90 top
Rset04 "Res2" J1-0603 23675,16704.06 r90 top
S1 "SW-DPST" DPST-4 7169.13,8055 r90 top
U1 "ATmega328P-AU" 32A_N 7894.13,8020 r0 top
VR1 "5V" SOT223_N 14505.43,9860 r0 top
VR2 "5V" SOT223_N 12980.43,9860 r0 top
VR3 "5V" SOT223_N 11435.43,9860 r0 top
VR4 "5V" SOT223_N 9885.43,9860 r0 top
VR5 "5V" SOT223_N 8340.43,9860 r0 top

## Footprints (in the part's own frame and the unit in brackets; to place one, negate y for a bottom-side part, rotate by r counter-clockwise, add the part's x,y. Pads: shape width x height; smd on the part's side, far side on the other; paste and mask are expansions set on the pad)
1CA470WR [mm]
  rect 2.5x1.2 smd: 1(2.54,0) 2(-2.54,0)
  silkscreen extent -4.06,-3.05 4.06,3.05
3.2X1.6X1.1 [mm] "SMT LED; 2 Flat Leads"
  rect 1.5x1.5 smd: 1(-1.75,0) 2(1.75,0)
  silkscreen extent -2.9,-1.15 3.2,1.15
3.5X2.8X1.9 [mm] "SM LED; 2 C-Bend Leads; Body 3.5 x 2.8 x 1.9 mm, inc leads (LxWxH typ)"
  rect 1.5x2.6 smd: 1(-1.5,0) 2(1.5,0)
  silkscreen extent -2.65,-1.7 2.95,1.7
6-0805_N [mm] "Chip Resistor, Body 2.0x1.2mm, IPC Medium Density"
  rect 1.2x1.4 smd: 1(-0.9,0) 2(0.9,0)
  silkscreen extent 0,-0.6 0,0.6, body extent -1.07,-0.7 1.07,0.7, height 0.7
32A_N [mm] "Thin QFP, 32-Leads, Body 7x7mm, Pitch 0.8mm, IPC Medium Density"
  oval 1.65x0.55 smd: 1(-4.2,2.8) 2(-4.2,2) 3(-4.2,1.2) 4(-4.2,0.4) 5(-4.2,-0.4) 6(-4.2,-1.2) 7(-4.2,-2) 8(-4.2,-2.8) 17(4.2,-2.8) 18(4.2,-2) 19(4.2,-1.2) 20(4.2,-0.4) 21(4.2,0.4) 22(4.2,1.2) 23(4.2,2) 24(4.2,2.8)
  oval 0.55x1.65 smd: 9(-2.8,-4.2) 10(-2,-4.2) 11(-1.2,-4.2) 12(-0.4,-4.2) 13(0.4,-4.2) 14(1.2,-4.2) 15(2,-4.2) 16(2.8,-4.2) 25(2.8,4.2) 26(2,4.2) 27(1.2,4.2) 28(0.4,4.2) 29(-0.4,4.2) 30(-1.2,4.2) 31(-2,4.2) 32(-2.8,4.2)
  silkscreen extent -4.32,-2.95 2.95,3.75, body extent -3.5,-3.5 3.5,3.5, height 1.2
"C2032 Battery Holder" [mil]
  rect 102x142 smd: 1(-577,0) 2(577,0)
  Keep-Out Layer region: -216,-138 216,-138 216,138 -216,138
  silkscreen extent -710,-394 394,394
"Crystal Oscillator" [mil]
  round 60 hole 30: 1(-100,0) 2(100,0)
  Top Layer region: -195,50 -245,50 -245,-50 -195,-50
  Top Layer region: 190,-50 240,-50 240,50 190,50
  silkscreen extent -212,-105 207,105
DPST-4 [mm] "Switch; 4 Leads"
  rect 1.85x1.85 hole 1.1: 1(-2.54,1.27)
  round 1.85 hole 1.1: 2(-2.54,-1.27) 3(2.54,-1.27) 4(2.54,1.27)
  silkscreen extent -4.88,-2.54 4.28,2.54
HDR1X2 [mm] "Connector; Header; 2 Position"
  rect 1.5x1.5 hole 0.9: 1(0,0)
  round 1.5 hole 0.9: 2(2.54,0)
  silkscreen extent -1.27,-1.27 3.81,1.27
HDR1X6 [mm] "Connector; Header; 6 Position"
  rect 1.5x1.5 hole 0.9: 1(0,0)
  round 1.5 hole 0.9: 2(2.54,0) 3(5.08,0) 4(7.62,0) 5(10.16,0) 6(12.7,0)
  silkscreen extent -1.27,-1.27 13.97,1.27
HDR1X16 [mm] "Connector; Header; 16 Position"
  rect 1.5x1.5 hole 0.9: 1(0,0)
  round 1.5 hole 0.9: 2(2.54,0) 3(5.08,0) 4(7.62,0) 5(10.16,0) 6(12.7,0) 7(15.24,0) 8(17.78,0) 9(20.32,0) 10(22.86,0) 11(25.4,0) 12(27.94,0) 13(30.48,0) 14(33.02,0) 15(35.56,0) 16(38.1,0)
  silkscreen extent -1.27,-1.27 39.37,1.27
HDR2X3 [mm] "Connector; Header; 3x2 Position"
  rect 1.5x1.5 hole 0.9: 1(0,0)
  round 1.5 hole 0.9: 2(0,2.54) 3(2.54,0) 4(2.54,2.54) 5(5.08,0) 6(5.08,2.54)
  silkscreen extent -1.27,-1.27 6.35,3.81
J1-0603 [mm] "Chip Resistor; Body 1.6 x 0.8 mm (LxW typ)"
  rect 1.1x1 smd: 1(-0.85,0) 2(0.85,0)
PIN2 [mm] "Photosensitive Diode; 2 Leads"
  rect 1.5x1.5 hole 0.9: 1(0,0)
  round 1.5 hole 0.9: 2(2.54,0)
  silkscreen extent -1.4,-1.4 3.94,2.17
SMC [mm] "DO-214-AB/SMC; 2 C-Bend Leads; Body 7.9 x 5.9 mm, inc. leads (LxW)"
  rect 2.4x3.3 smd: 1(-3.475,0) 2(3.475,0)
  silkscreen extent -5.07,-2.05 5.43,2.05
SOT223_N [mm] "SOT223, 4-Leads, Body 6.5x3.5mm, Pitch 2.3mm, Lead Span 7mm, IPC Medium Density"
  rect 2.4x1 smd: 1(-2.9,2.3) 2(-2.9,0) 3(-2.9,-2.3)
  rect 2.4x3.3 smd: 4(2.9,0)
  silkscreen extent -3.02,-3.35 1.4,3.47, body extent -1.85,-3.35 1.85,3.35, height 1.7
W16-H2_N [mm] "SOIC, 16-Leads, Body 10.3x7.5mm, Pitch 1.27mm, IPC Medium Density"
  oval 2.3x0.6 smd: 1(-4.55,4.445) 2(-4.55,3.175) 3(-4.55,1.905) 4(-4.55,0.635) 5(-4.55,-0.635) 6(-4.55,-1.905) 7(-4.55,-3.175) 8(-4.55,-4.445) 9(4.55,-4.445) 10(4.55,-3.175) 11(4.55,-1.905) 12(4.55,-0.635) 13(4.55,0.635) 14(4.55,1.905) 15(4.55,3.175) 16(4.55,4.445)
  silkscreen extent -4.67,-5.25 3,5.42, body extent -3.8,-5.25 3.8,5.25, height 2.65
WSO24_N [mm] "SOIC, 24-Leads, Body 15.4x7.5mm, Pitch 1.27mm, IPC Medium Density"
  oval 2.3x0.6 smd: 1(-4.55,6.985) 2(-4.55,5.715) 3(-4.55,4.445) 4(-4.55,3.175) 5(-4.55,1.905) 6(-4.55,0.635) 7(-4.55,-0.635) 8(-4.55,-1.905) 9(-4.55,-3.175) 10(-4.55,-4.445) 11(-4.55,-5.715) 12(-4.55,-6.985) 13(4.55,-6.985) 14(4.55,-5.715) 15(4.55,-4.445) 16(4.55,-3.175) 17(4.55,-1.905) 18(4.55,-0.635) 19(4.55,0.635) 20(4.55,1.905) 21(4.55,3.175) 22(4.55,4.445) 23(4.55,5.715) 24(4.55,6.985)
  silkscreen extent -4.67,-7.95 3,7.96, body extent -3.8,-7.8 3.8,7.8, height 2.65

## Part data
C1 C2 C3 C4 C5 C6 C7 C8 C9 C10 C11 C12 C13 C14 C15 C16 C17 C18 C19 C20: "Capacitor (Semiconductor SIM Model)"
Cp1 Cp2 Cp3 Cp4 Cp5 Cp6: "Polarized Capacitor (Surface Mount)"
D1: "Default Diode"
J1: library part "Header 3X2", "Header, 3-Pin, Dual row"
JP2: library part "Header 6", "Header, 6-Pin"
JP3: "Header, 16-Pin"
LED1 LED2 LED3 LED4 LED5 LED6 LED7 LED8 LED9 LED10 LED11 LED12 LED13 LED14 LED15 LED16 LED17 LED18 LED19 LED20 LED21 LED22 LED23 LED24 LED25 LED26 LED27 LED28 LED29 LED30 LED31 LED32 LED33 LED34 LED35 LED36 LED37 LED38 LED39 LED40 LED41 LED42 LED43 LED44 LED45 LED46 LED47 LED48 LED49 LED50 LED51 LED52 LED53 LED54 LED55 LED56 LED57 LED58 LED59 LED60 LED61 LED62 LED63 LED64 LED65 LED66 LED67 LED68 LED69 LED70 LED71 LED72 LED73 LED74 LED75 LED76 LED77 LED78 LED79 LED80 LED81 LED82 LED83 LED84 LED85 LED86 LED87 LED88 LED89 LED90 LED91 LED92 LED93 LED94 LED95 LED96 LED97 LED98 LED99 LED100 LED101 LED102 LED103 LED104 LED105 LED106 LED107 LED108 LED109 LED110 LED111 LED112 LED113 LED114 LED115 LED116 LED117 LED118 LED119 LED120 LED121 LED122 LED123 LED124 LED125 LED126 LED127 LED128 LED129 LED130 LED131 LED132 LED133 LED134 LED135 LED136 LED137 LED138 LED139 LED140 LED141 LED142 LED143 LED144 LED145 LED146 LED147 LED148 LED149 LED150 LED151 LED152 LED153 LED154 LED155 LED156 LED157 LED158 LED159 LED160 LED161 LED162 LED163 LED164 LED165 LED166 LED167 LED168 LED169 LED170 LED171 LED172 LED173 LED174 LED175 LED176 LED177 LED178 LED179 LED180 LED181 LED182 LED183 LED184 LED185 LED186 LED187 LED188 LED189 LED190 LED191 LED192 LED193 LED194 LED195 LED196 LED197 LED198 LED199 LED200 LED201 LED202 LED203 LED204 LED205 LED206 LED207 LED208 LED209 LED210 LED211 LED212 LED213 LED214 LED215 LED216 LED217 LED218 LED219 LED220 LED221 LED222 LED223 LED224 LED225 LED226 LED227 LED228 LED229 LED230 LED231 LED232 LED233 LED234 LED235 LED236 LED237 LED238 LED239 LED240 LED241 LED242 LED243 LED244 LED245 LED246 LED247 LED248 LED249 LED250 LED251 LED252 LED253 LED254 LED255 LED256: "Typical BLUE SiC LED"
LED_01 LED_02 LED_03 LED_04 LED_05 LED_06: "Typical RED, GREEN, YELLOW, AMBER GaAs LED"
MAX1 MAX2 MAX3 MAX4: "Serially Interfaced, 8-Digit LED Display Driver"
Photo: "Photosensitive Diode"
PowerIn: "Header, 2-Pin"
R1 R2 R3 R4 R5 R6 R7 R8 R9 R10 Rset01 Rset02 Rset03 Rset04: "Resistor"
S1: "Double-Pole, Single-Throw Switch"
U1: "8-bit AVR Microcontroller, 32KB Flash, 1KB EEPROM, 2KB SRAM, 32-pin TQFP, Industrial Grade (-40°C to 85°C)"
VR1 VR2 VR3 VR4 VR5: library part "Volt Reg", "Voltage Regulator"

## Nets (pads, with @x,y where several pads share a name; then routed paths per layer and width w, separated by ;. In a path a pad name is that pad's centre, name@x,y a point inside that pad or via, vN(x,y) a via of type N, cw(c..) or ccw(c..) an arc to the next point about the centre after c; other vN are vias at no path point)
CLK: JP3.7 MAX1.13 MAX2.13 MAX3.13 MAX4.13 U1.25
DIG0: LED1.2 LED9.2 LED17.2 LED25.2 LED33.2 LED41.2 LED49.2 LED57.2 MAX1.2
DIG0A: LED65.2 LED73.2 LED81.2 LED89.2 LED97.2 LED105.2 LED113.2 LED121.2 MAX2.2
DIG0B: LED129.2 LED137.2 LED145.2 LED153.2 LED161.2 LED169.2 LED177.2 LED185.2 MAX3.2
DIG0C: LED193.2 LED201.2 LED209.2 LED217.2 LED225.2 LED233.2 LED241.2 LED249.2 MAX4.2
DIG1: LED2.2 LED10.2 LED18.2 LED26.2 LED34.2 LED42.2 LED50.2 LED58.2 MAX1.11
DIG1A: LED66.2 LED74.2 LED82.2 LED90.2 LED98.2 LED106.2 LED114.2 LED122.2 MAX2.11
DIG1B: LED130.2 LED138.2 LED146.2 LED154.2 LED162.2 LED170.2 LED178.2 LED186.2 MAX3.11
DIG1C: LED194.2 LED202.2 LED210.2 LED218.2 LED226.2 LED234.2 LED242.2 LED250.2 MAX4.11
DIG2: LED3.2 LED11.2 LED19.2 LED27.2 LED35.2 LED43.2 LED51.2 LED59.2 MAX1.6
DIG2A: LED67.2 LED75.2 LED83.2 LED91.2 LED99.2 LED107.2 LED115.2 LED123.2 MAX2.6
DIG2B: LED131.2 LED139.2 LED147.2 LED155.2 LED163.2 LED171.2 LED179.2 LED187.2 MAX3.6
DIG2C: LED195.2 LED203.2 LED211.2 LED219.2 LED227.2 LED235.2 LED243.2 LED251.2 MAX4.6
DIG3: LED4.2 LED12.2 LED20.2 LED28.2 LED36.2 LED44.2 LED52.2 LED60.2 MAX1.7
DIG3A: LED68.2 LED76.2 LED84.2 LED92.2 LED100.2 LED108.2 LED116.2 LED124.2 MAX2.7
DIG3B: LED132.2 LED140.2 LED148.2 LED156.2 LED164.2 LED172.2 LED180.2 LED188.2 MAX3.7
DIG3C: LED196.2 LED204.2 LED212.2 LED220.2 LED228.2 LED236.2 LED244.2 LED252.2 MAX4.7
DIG4: LED5.2 LED13.2 LED21.2 LED29.2 LED37.2 LED45.2 LED53.2 LED61.2 MAX1.3
DIG4A: LED69.2 LED77.2 LED85.2 LED93.2 LED101.2 LED109.2 LED117.2 LED125.2 MAX2.3
DIG4B: LED133.2 LED141.2 LED149.2 LED157.2 LED165.2 LED173.2 LED181.2 LED189.2 MAX3.3
DIG4C: LED197.2 LED205.2 LED213.2 LED221.2 LED229.2 LED237.2 LED245.2 LED253.2 MAX4.3
DIG5: LED6.2 LED14.2 LED22.2 LED30.2 LED38.2 LED46.2 LED54.2 LED62.2 MAX1.10
DIG5A: LED70.2 LED78.2 LED86.2 LED94.2 LED102.2 LED110.2 LED118.2 LED126.2 MAX2.10
DIG5B: LED134.2 LED142.2 LED150.2 LED158.2 LED166.2 LED174.2 LED182.2 LED190.2 MAX3.10
DIG5C: LED198.2 LED206.2 LED214.2 LED222.2 LED230.2 LED238.2 LED246.2 LED254.2 MAX4.10
DIG6: LED7.2 LED15.2 LED23.2 LED31.2 LED39.2 LED47.2 LED55.2 LED63.2 MAX1.5
DIG6A: LED71.2 LED79.2 LED87.2 LED95.2 LED103.2 LED111.2 LED119.2 LED127.2 MAX2.5
DIG6B: LED135.2 LED143.2 LED151.2 LED159.2 LED167.2 LED175.2 LED183.2 LED191.2 MAX3.5
DIG6C: LED199.2 LED207.2 LED215.2 LED223.2 LED231.2 LED239.2 LED247.2 LED255.2 MAX4.5
DIG7: LED8.2 LED16.2 LED24.2 LED32.2 LED40.2 LED48.2 LED56.2 LED64.2 MAX1.8
DIG7A: LED72.2 LED80.2 LED88.2 LED96.2 LED104.2 LED112.2 LED120.2 LED128.2 MAX2.8
DIG7B: LED136.2 LED144.2 LED152.2 LED160.2 LED168.2 LED176.2 LED184.2 LED192.2 MAX3.8
DIG7C: LED200.2 LED208.2 LED216.2 LED224.2 LED232.2 LED240.2 LED248.2 LED256.2 MAX4.8
DIN: JP3.5
DIN01: MAX1.1 U1.23
DTR: C8.1 JP2.6
GND: BAT1.2 C1.1 C2.1 C3.1 C4.1 C5.1 C6.2 C7.2 C9.1 C10.1 C11.2 C12.2 C13.2 C14.2 C15.2 C16.2 C17.2 C18.2 C19.2 C20.2 Cp1.2 Cp2.2 Cp3.2 Cp4.2 Cp5.2 Cp6.2 J1.6 JP2.1 JP2.2 LED_01.2 LED_02.2 LED_03.2 LED_04.2 LED_05.2 LED_06.2 MAX1.4 MAX1.9 MAX2.4 MAX2.9 MAX3.4 MAX3.9 MAX4.4 MAX4.9 PowerIn.2 Q1.5 Q1.6 Q1.7 Q1.8 Q1.9 Q1.10 Q1.11 Q1.12 Q1.13 R10.1 S1.1 U1.3 U1.5 U1.21 VR1.1 VR2.1 VR3.1 VR4.1 VR5.1
ISET: MAX4.18 Rset04.2
LDR: Photo.2 R10.2 U1.26
LOAD: JP3.6 MAX1.12 MAX2.12 MAX3.12 MAX4.12 U1.24
MISO: J1.1 U1.16
MOSI: J1.4 U1.15
NetBAT1_1: BAT1.1 Q1.14
NetC10_2: C10.2 U1.20
NetC11_1: C11.1 Cryst_01.1 U1.7
NetC12_1: C12.1 Cryst_01.2 U1.8
NetD1_1: D1.1 PowerIn.1
NetLED_01_1: LED_01.1 R1.1
NetLED_02_1: LED_02.1 R2.1
NetLED_03_1: LED_03.1 R3.1
NetLED_04_1: LED_04.1 R4.1
NetLED_05_1: LED_05.1 R5.1
NetLED_06_1: LED_06.1 R6.2
NetMAX1_24: MAX1.24 MAX2.1
NetMAX2_24: MAX2.24 MAX3.1
NetMAX3_24: MAX3.24 MAX4.1
NetR6_1: R6.1 U1.17
PIN1: JP3.16 U1.1
PIN2: JP3.15 U1.2
PIN9: JP3.14 U1.9
PIN10: JP3.13 U1.10
PIN11: JP3.12 U1.11
PIN12: JP3.11 U1.12
PIN13: JP3.10 U1.13
PIN14: JP3.9 U1.14
PIN32: JP3.8 U1.32
RESET: C8.2 J1.5 Q1.4 R9.2 S1.2 U1.29
RX: JP2.4 U1.30
SCK: J1.3
SCL: Q1.16 R7.2 U1.28
SDA: Q1.15 R8.1 U1.27
"SED DP": LED57.1 LED58.1 LED59.1 LED60.1 LED61.1 LED62.1 LED63.1 LED64.1 MAX1.22
"SED DP1": LED121.1 LED122.1 LED123.1 LED124.1 LED125.1 LED126.1 LED127.1 LED128.1 MAX2.22
"SED DP2": LED185.1 LED186.1 LED187.1 LED188.1 LED189.1 LED190.1 LED191.1 LED192.1 MAX3.22
"SED DP3": LED249.1 LED250.1 LED251.1 LED252.1 LED253.1 LED254.1 LED255.1 LED256.1 MAX4.22
"SEG A": LED1.1 LED2.1 LED3.1 LED4.1 LED5.1 LED6.1 LED7.1 LED8.1 MAX1.14
"SEG A1": LED65.1 LED66.1 LED67.1 LED68.1 LED69.1 LED70.1 LED71.1 LED72.1 MAX2.14
"SEG A2": LED129.1 LED130.1 LED131.1 LED132.1 LED133.1 LED134.1 LED135.1 LED136.1 MAX3.14
"SEG A3": LED193.1 LED194.1 LED195.1 LED196.1 LED197.1 LED198.1 LED199.1 LED200.1 MAX4.14
"SEG B": LED9.1 LED10.1 LED11.1 LED12.1 LED13.1 LED14.1 LED15.1 LED16.1 MAX1.16
"SEG B1": LED73.1 LED74.1 LED75.1 LED76.1 LED77.1 LED78.1 LED79.1 LED80.1 MAX2.16
"SEG B2": LED137.1 LED138.1 LED139.1 LED140.1 LED141.1 LED142.1 LED143.1 LED144.1 MAX3.16
"SEG B3": LED201.1 LED202.1 LED203.1 LED204.1 LED205.1 LED206.1 LED207.1 LED208.1 MAX4.16
"SEG C": LED17.1 LED18.1 LED19.1 LED20.1 LED21.1 LED22.1 LED23.1 LED24.1 MAX1.20
"SEG C1": LED81.1 LED82.1 LED83.1 LED84.1 LED85.1 LED86.1 LED87.1 LED88.1 MAX2.20
"SEG C2": LED145.1 LED146.1 LED147.1 LED148.1 LED149.1 LED150.1 LED151.1 LED152.1 MAX3.20
"SEG C3": LED209.1 LED210.1 LED211.1 LED212.1 LED213.1 LED214.1 LED215.1 LED216.1 MAX4.20
"SEG D": LED25.1 LED26.1 LED27.1 LED28.1 LED29.1 LED30.1 LED31.1 LED32.1 MAX1.23
"SEG D1": LED89.1 LED90.1 LED91.1 LED92.1 LED93.1 LED94.1 LED95.1 LED96.1 MAX2.23
"SEG D2": LED153.1 LED154.1 LED155.1 LED156.1 LED157.1 LED158.1 LED159.1 LED160.1 MAX3.23
"SEG D3": LED217.1 LED218.1 LED219.1 LED220.1 LED221.1 LED222.1 LED223.1 LED224.1 MAX4.23
"SEG E": LED33.1 LED34.1 LED35.1 LED36.1 LED37.1 LED38.1 LED39.1 LED40.1 MAX1.21
"SEG E1": LED97.1 LED98.1 LED99.1 LED100.1 LED101.1 LED102.1 LED103.1 LED104.1 MAX2.21
"SEG E2": LED161.1 LED162.1 LED163.1 LED164.1 LED165.1 LED166.1 LED167.1 LED168.1 MAX3.21
"SEG E3": LED225.1 LED226.1 LED227.1 LED228.1 LED229.1 LED230.1 LED231.1 LED232.1 MAX4.21
"SEG F": LED41.1 LED42.1 LED43.1 LED44.1 LED45.1 LED46.1 LED47.1 LED48.1 MAX1.15
"SEG F1": LED105.1 LED106.1 LED107.1 LED108.1 LED109.1 LED110.1 LED111.1 LED112.1 MAX2.15
"SEG F2": LED169.1 LED170.1 LED171.1 LED172.1 LED173.1 LED174.1 LED175.1 LED176.1 MAX3.15
"SEG F3": LED233.1 LED234.1 LED235.1 LED236.1 LED237.1 LED238.1 LED239.1 LED240.1 MAX4.15
"SEG G": LED49.1 LED50.1 LED51.1 LED52.1 LED53.1 LED54.1 LED55.1 LED56.1 MAX1.17
"SEG G1": LED113.1 LED114.1 LED115.1 LED116.1 LED117.1 LED118.1 LED119.1 LED120.1 MAX2.17
"SEG G2": LED177.1 LED178.1 LED179.1 LED180.1 LED181.1 LED182.1 LED183.1 LED184.1 MAX3.17
"SEG G3": LED241.1 LED242.1 LED243.1 LED244.1 LED245.1 LED246.1 LED247.1 LED248.1 MAX4.17
TX: JP2.5 U1.31
VCC#1: C1.2 C13.1 C14.1 Cp1.1 MAX1.19 R1.2 Rset01.1 VR1.2
VCC#2: C2.2 C15.1 C16.1 Cp2.1 MAX2.19 R2.2 Rset02.1 VR2.2
VCC#3: C3.2 C17.1 C18.1 Cp3.1 MAX3.19 R3.2 Rset03.1 VR3.2
VCC#4: C4.2 C19.1 C20.1 Cp4.1 MAX4.19 R4.2 Rset04.1 VR4.2
VCC#5: C5.2 C6.1 C7.1 C9.2 Cp5.1 J1.2 JP2.3 Photo.1 Q1.2 R5.2 R7.1 R8.2 R9.1 U1.4 U1.6 U1.18 VR5.2
VINP: Cp6.1 D1.2 VR1.3 VR2.3 VR3.3 VR4.3 VR5.3
pads on no net: JP3.1 JP3.2 JP3.3 JP3.4 MAX1.18 MAX2.18 MAX3.18 MAX4.24 Q1.1 Q1.3 Rset01.2 Rset02.2 Rset03.2 S1.3 S1.4 U1.19 U1.22 VR1.4 VR2.4 VR3.4 VR4.4 VR5.4

## Keep-outs
Keep-Out Layer:
  lines w10: 2050,3050 2050,17170 16170,17170 16170,3050 2050,3050

## Silkscreen, mask and mechanical layers (free items; w line width, h text height)
Drill Drawing:
  text ".LEGEND" at 6965,12004.06 h60
  text "Drill Drawing." at 6965,11904.06 h60

## Dimensions
2050,3050 to 2050,17170 on Mechanical 1
2050,3050 to 16170,3050 on Mechanical 1

## Text inside footprints (layer, text, board x,y; h text height)
BAT1: Top Overlay "C2032" at 9389.13,7445 h60 r90
J1: Top Overlay "6" at 6884.13,8185 h50 r90; Top Overlay "5" at 6984.13,8185 h50 r90; Top Overlay "2" at 6884.13,7825 h50 r90; Top Overlay "1" at 6984.13,7845 h50 r90